# EAGLE board 1sluzba (EAGLE 8.5.0)
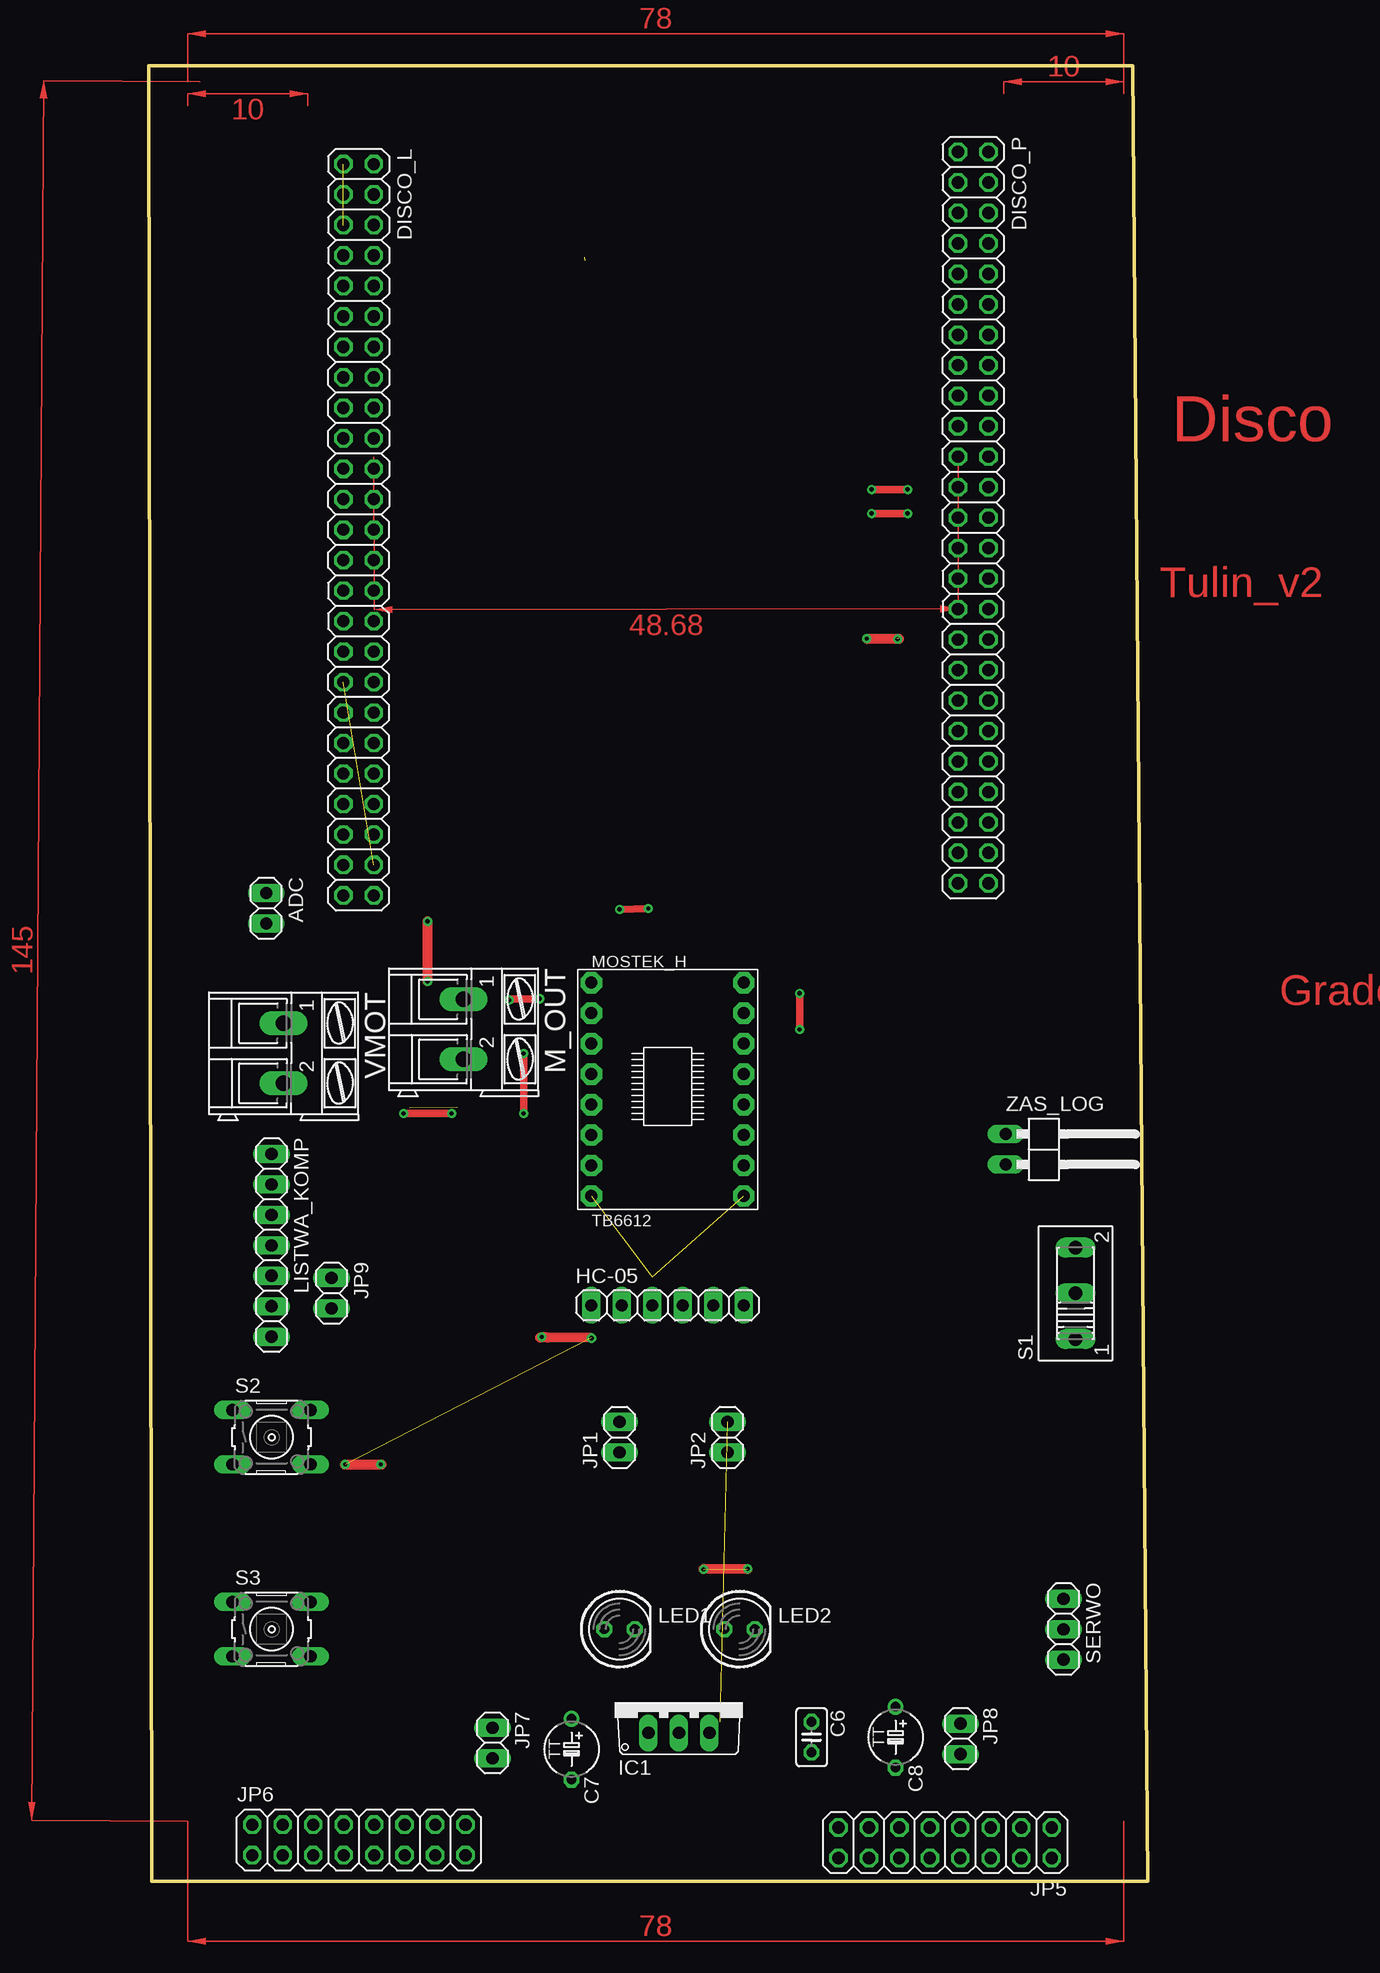
[diagram p0: board, top side]
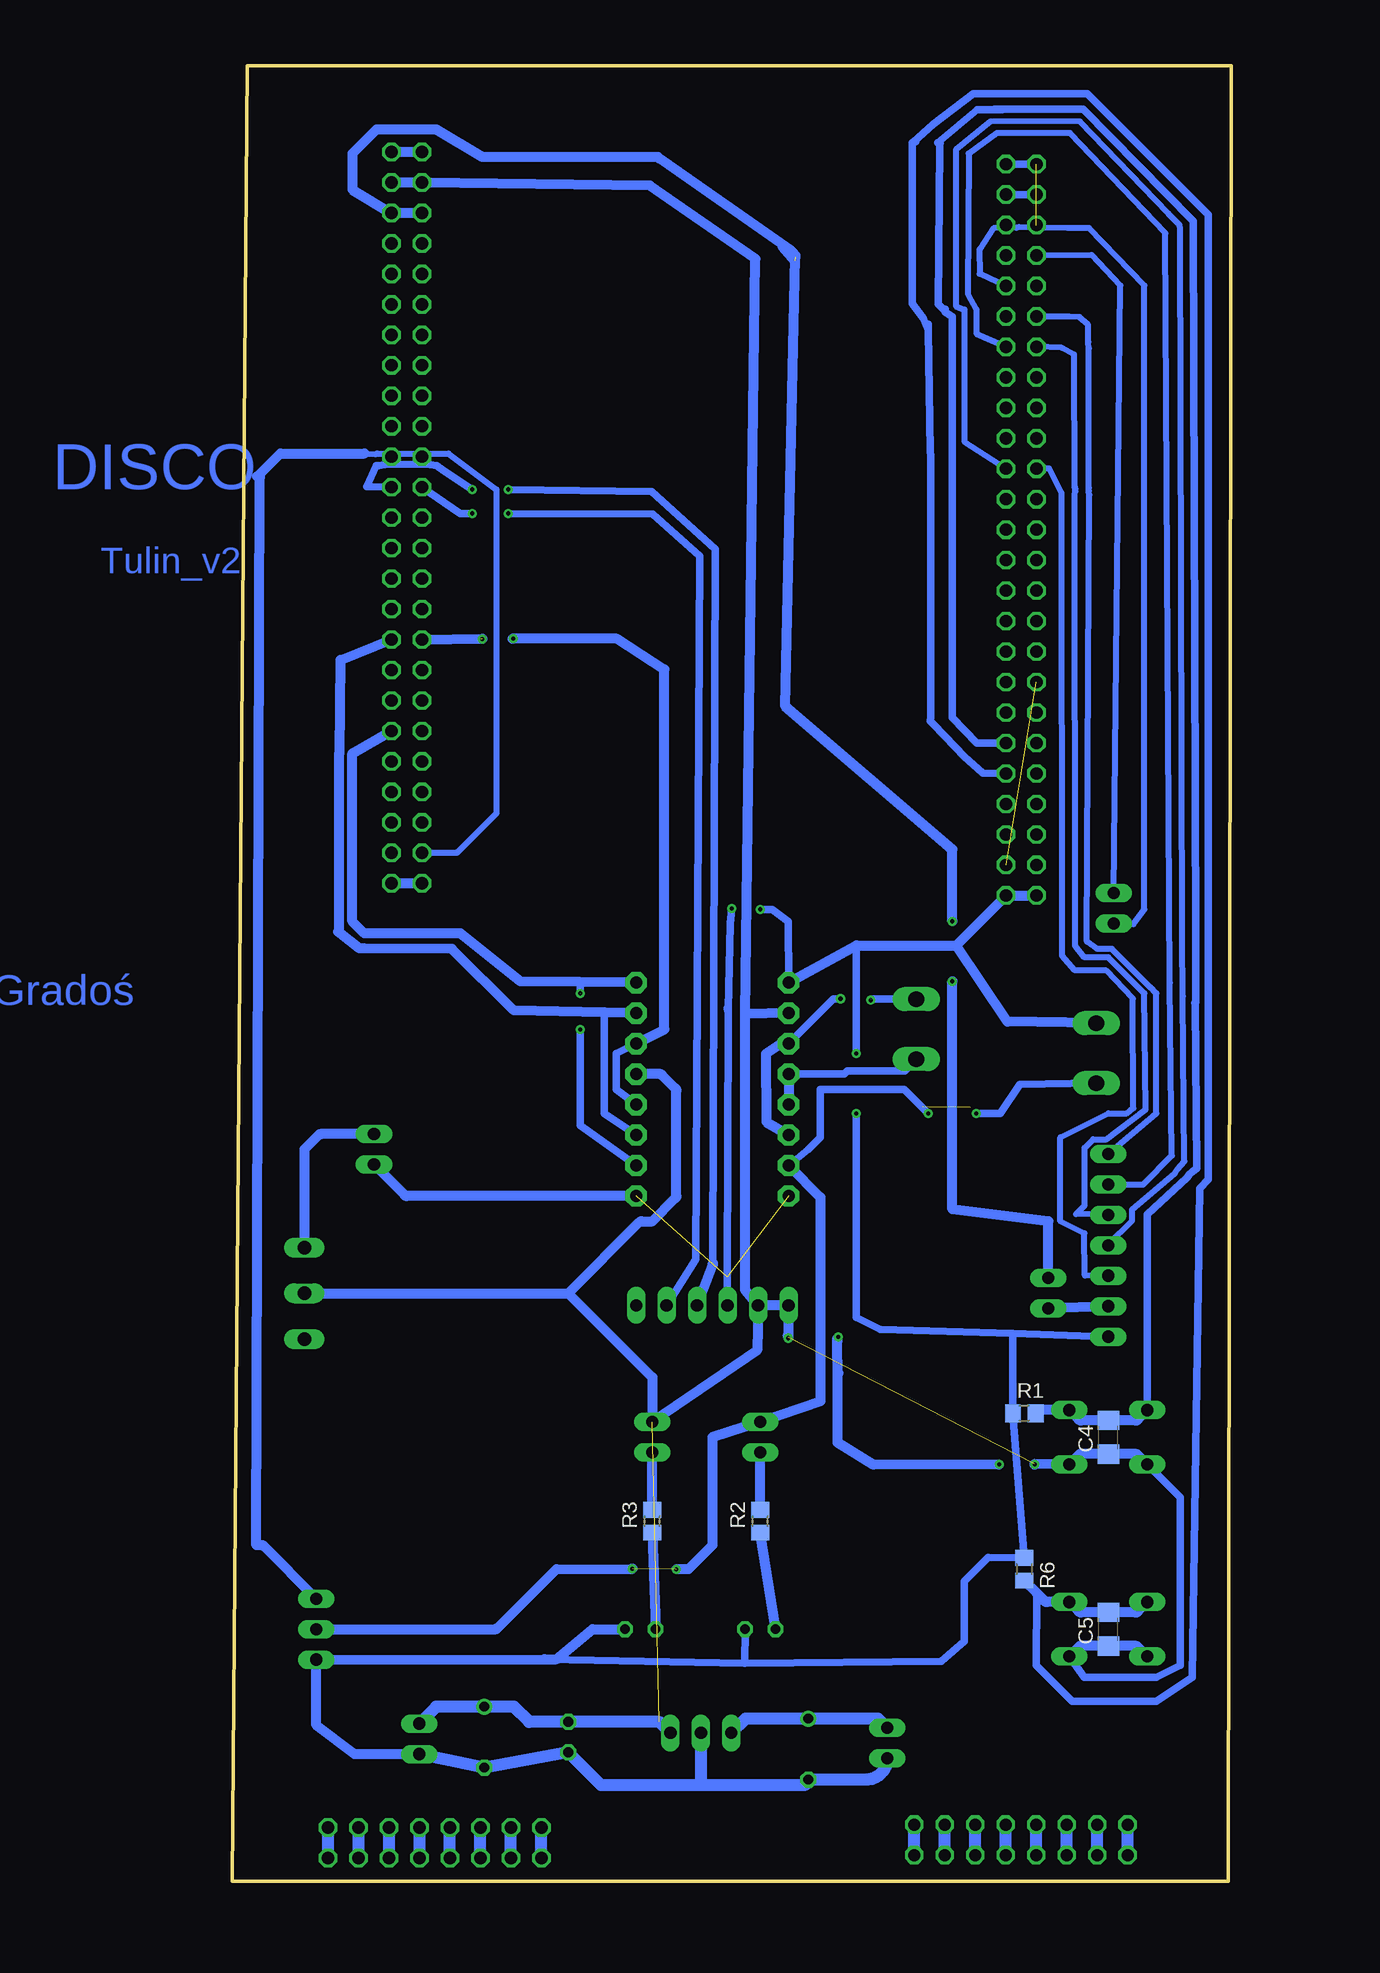
[diagram p1: board, bottom side, seen from below]

Size 83.24 x 151.31 mm. Coordinates in mm from the lower left corner, seen from the top.
Outline: 0.24,0 83.24,0 82,151.31 0,151.31 0.24,0
Copper layers (1*16): Top 0.035mm / dielectric 1.5mm / Bottom 0.035mm
Design rules "default": minimum track width 10mil, minimum drill 24mil, track to track 8mil, track to pad 8mil, pad to pad 8mil, via to via 8mil, smd to smd 8mil, copper to edge 40mil, drill to drill 8mil, minimum pad ring 10mil, minimum via ring 8mil, stop-mask expansion 4mil, vias tented up to drill 0mil, thermal gap 10mil

## Footprints (pad centres in the part's own frame; a part is rotated, then mirrored left to right if it is on the bottom)
1X02 = drill 1.016 long: 1 -1.27,0; 2 1.27,0
C1206 = smd 1.6 x 1.8: 1 -1.4,0; 2 1.4,0
C025-025X050 = drill 0.813 octagon: 1 -1.27,0; 2 1.27,0
TAP5-45 = drill 0.813: + -2.54,0 | drill 0.813 octagon: - 2.54,0
2X25 = drill 1.016 octagon: 1 -30.48,-1.27; 2 -30.48,1.27; 3 -27.94,-1.27; 4 -27.94,1.27; 5 -25.4,-1.27; 6 -25.4,1.27; 7 -22.86,-1.27; 8 -22.86,1.27; 9 -20.32,-1.27; 10 -20.32,1.27; 11 -17.78,-1.27; 12 -17.78,1.27; 13 -15.24,-1.27; 14 -15.24,1.27; 15 -12.7,-1.27; 16 -12.7,1.27; 17 -10.16,-1.27; 18 -10.16,1.27; 19 -7.62,-1.27; 20 -7.62,1.27; 21 -5.08,-1.27; 22 -5.08,1.27; 23 -2.54,-1.27; 24 -2.54,1.27; 25 0,-1.27; 26 0,1.27; 27 2.54,-1.27; 28 2.54,1.27; 29 5.08,-1.27; 30 5.08,1.27; 31 7.62,-1.27; 32 7.62,1.27; 33 10.16,-1.27; 34 10.16,1.27; 35 12.7,-1.27; 36 12.7,1.27; 37 15.24,-1.27; 38 15.24,1.27; 39 17.78,-1.27; 40 17.78,1.27; 41 20.32,-1.27; 42 20.32,1.27; 43 22.86,-1.27; 44 22.86,1.27; 45 25.4,-1.27; 46 25.4,1.27; 47 27.94,-1.27; 48 27.94,1.27; 49 30.48,-1.27; 50 30.48,1.27
1X06 = drill 1.016 long: 1 -6.35,0; 2 -3.81,0; 3 -1.27,0; 4 1.27,0; 5 3.81,0; 6 6.35,0
TO220V = drill 1.016 long: 1 -2.54,-2.54; 2 0,-2.54; 3 2.54,-2.54
2X08 = drill 1.016 octagon: 1 -8.89,-1.27; 2 -8.89,1.27; 3 -6.35,-1.27; 4 -6.35,1.27; 5 -3.81,-1.27; 6 -3.81,1.27; 7 -1.27,-1.27; 8 -1.27,1.27; 9 1.27,-1.27; 10 1.27,1.27; 11 3.81,-1.27; 12 3.81,1.27; 13 6.35,-1.27; 14 6.35,1.27; 15 8.89,-1.27; 16 8.89,1.27
LED5MM = drill 0.813 octagon: A -1.27,0; K 1.27,0
1X07 = drill 1.016 long: 1 -7.62,0; 2 -5.08,0; 3 -2.54,0; 4 0,0; 5 2.54,0; 6 5.08,0; 7 7.62,0
AK300/2 = drill 1.321 long: 1 -2.515,0; 2 2.489,0
MODUL_POLOLU = drill 1 pad 1.778 octagon: A02 -6.35,1.27; AIN1 6.35,3.81; AIN2 6.35,6.35; AO1 -6.35,3.81; BIN1 6.35,-1.27; BIN2 6.35,-3.81; BO1 -6.35,-3.81; BO2 -6.35,-1.27; GND1 -6.35,8.89; GND2 -6.35,-8.89; GND3 6.35,-8.89; PWMA 6.35,8.89; PWMB 6.35,-6.35; STBY 6.35,1.27; VCC -6.35,6.35; VMOT -6.35,-6.35
R0805 = smd 1.3 x 1.5: 1 -0.95,0; 2 0.95,0
255SB = drill 1.118 long: 1 -3.81,0; 2 0,0; 3 3.81,0
B3F-10XX = drill 1.016 long: 1 -3.251,2.261; 2 3.251,2.261; 3 -3.251,-2.261; 4 3.251,-2.261
1X03 = drill 1.016 long: 1 -2.54,0; 2 0,0; 3 2.54,0
1X02/90 = drill 1.016 long: 1 -1.27,-3.81; 2 1.27,-3.81

## Placement (x,y rotation side)
ADC  [1X02]  9.79,81.08 270 top
C4  100n  [C1206]  10.24,37 90 bottom
C5  100n  [C1206]  10.24,21 90 bottom
C6  100nF  [C025-025X050]  55.24,12 270 top
C7  47uF  [TAP5-45]  35.24,11 270 top
C8  470uF  [TAP5-45]  62.24,12 270 top
DISCO_L  [2X25]  17.5,112.65 270 top
DISCO_P  [2X25]  68.71,113.65 270 top
HC-05  [1X06]  43.24,48 0 top
IC1  786TV  [TO220V]  44.19,14.89 0 top
JP1  [1X02]  39.24,37 90 top
JP2  [1X02]  48.24,37 90 top
JP5  [2X08]  66.37,3.2 180 top
JP6  [2X08]  17.52,3.44 0 top
JP7  [1X02]  28.66,11.51 270 top
JP8  [1X02]  67.66,11.86 270 top
JP9  [1X02]  15.24,49 270 top
LED1  [LED5MM]  39.24,21 0 top
LED2  [LED5MM]  49.24,21 0 top
LISTWA_KOMP  [1X07]  10.24,53 270 top
M_OUT  [AK300/2]  26.24,71 270 top
MOSTEK_H  MODUL_POLOLU  [MODUL_POLOLU]  43.24,66 0 top
R1  100k  [R0805]  17.24,39 0 bottom
R2  300  [R0805]  39.24,30 90 bottom
R3  300  [R0805]  48.24,30 90 bottom
R6  100k  [R0805]  17.24,26 270 bottom
S1  [255SB]  77.24,49 90 top
S2  [B3F-10XX]  10.24,37 0 top
S3  [B3F-10XX]  10.24,21 0 top
SERWO  [1X03]  76.24,21 270 top
VMOT  [AK300/2]  11.24,69 270 top
ZAS_LOG  [1X02/90]  75.24,61 270 top

## Library data of the parts
ADC DISCO_L DISCO_P HC-05 JP1 JP2 JP5-JP9 LISTWA_KOMP SERWO ZAS_LOG = pinhead
C4-C8 = rcl; SPICEPREFIX: C
IC1 = linear
LED1 LED2 = led
M_OUT VMOT = con-ptr500; OC_FARNELL: unknown; OC_NEWARK: unknown
MOSTEK_H = TB6612FNG
R1-R3 R6 = rcl; SPICEPREFIX: R
S1 = switch
S2 S3 = switch-omron; MPN: B3F-1000; OC_FARNELL: 176432; OC_NEWARK: 36M3542

## Nets
3V: DISCO_P.5 DISCO_P.6 JP9.1
A: JP9.2 LISTWA_KOMP.6
BOOT0: DISCO_P.21
GND: C6.2 C7.- C8.- DISCO_L.49 DISCO_L.50 HC-05.3 IC1.2 JP7.2 JP8.2 LED1.K LED2.K LISTWA_KOMP.7 MOSTEK_H.GND1 MOSTEK_H.GND2 MOSTEK_H.GND3 R1.1 R6.1 SERWO.3 VMOT.1 ZAS_LOG.2
GND1: DISCO_L.1 DISCO_L.2 DISCO_L.5
GND2: DISCO_L.23
GND3: DISCO_P.1 DISCO_P.2
GNDD: DISCO_P.49 DISCO_P.50
M_OUT_1: M_OUT.1 MOSTEK_H.AO1 MOSTEK_H.BO1
M_OUT_2: M_OUT.2 MOSTEK_H.A02 MOSTEK_H.BO2
N$1: JP5.1 JP5.2
N$2: JP5.3 JP5.4
N$3: JP5.5 JP5.6
N$4: JP5.7 JP5.8
N$5: JP5.9 JP5.10
N$6: JP5.11 JP5.12
N$7: JP5.13 JP5.14
N$8: JP5.15 JP5.16
N$9: JP6.1 JP6.2
N$10: JP6.3 JP6.4
N$11: JP6.5 JP6.6
N$12: JP6.7 JP6.8
N$13: JP6.9 JP6.10
N$14: JP6.11 JP6.12
N$15: JP6.13 JP6.14
N$16: JP6.15 JP6.16
N$17: C7.+ IC1.1 JP7.1
N$18: S1.3 ZAS_LOG.1
N$19: LED1.A R2.1
N$20: LED2.A R3.1
N$22: JP1.1 R2.2
N$24: JP2.1 R3.2
NC: DISCO_L.35 DISCO_L.48
NRST: DISCO_L.6
PA0: DISCO_L.12
PA1: DISCO_L.11 LISTWA_KOMP.1
PA2: DISCO_L.14 LISTWA_KOMP.2
PA3: DISCO_L.13 LISTWA_KOMP.3
PA4: DISCO_L.16
PA5: DISCO_L.15
PA6: DISCO_L.18
PA7: DISCO_L.17
PA8: DISCO_P.43
PA9: DISCO_P.44
PA10: DISCO_P.41
PA13: DISCO_P.42
PA14: DISCO_P.39
PA15: DISCO_P.40 MOSTEK_H.PWMA MOSTEK_H.PWMB
PB0: DISCO_L.22 LISTWA_KOMP.4
PB1: DISCO_L.21 LISTWA_KOMP.5
PB2: DISCO_L.24
PB3: DISCO_P.28
PB4: DISCO_P.25
PB5: DISCO_P.26
PB6: DISCO_P.23 HC-05.5
PB7: DISCO_P.24 HC-05.4
PB8: DISCO_P.19
PB9: DISCO_P.20
PB10: DISCO_L.34
PB12: DISCO_L.36
PB13: DISCO_L.37
PB14: DISCO_L.38
PB15: DISCO_L.39
PC0: DISCO_L.8
PC1: ADC.1 DISCO_L.7
PC2: ADC.2 DISCO_L.10
PC3: DISCO_L.9
PC4: DISCO_L.20
PC5: DISCO_L.19
PC6: DISCO_P.47 SERWO.1
PC7: DISCO_P.48
PC8: DISCO_P.45
PC9: DISCO_P.46
PC10: DISCO_P.37
PC11: DISCO_P.38
PC12: DISCO_P.35
PC13: DISCO_P.12
PC14: DISCO_P.9
PC15: DISCO_P.10
PD0: DISCO_P.36
PD1: DISCO_P.33 MOSTEK_H.AIN1 MOSTEK_H.BIN1
PD2: DISCO_P.34 MOSTEK_H.AIN2 MOSTEK_H.BIN2
PD3: DISCO_P.31
PD4: DISCO_P.32
PD5: DISCO_P.29
PD6: DISCO_P.30
PD7: DISCO_P.27
PD8: C4.2 DISCO_L.40 R1.2 S2.1 S2.2
PD9: DISCO_L.41
PD10: C5.2 DISCO_L.42 R6.2 S3.1 S3.2
PD11: DISCO_L.43
PD12: DISCO_L.44
PD13: DISCO_L.45
PD14: DISCO_L.46
PD15: DISCO_L.47
PE0: DISCO_P.17
PE1: DISCO_P.18
PE2: DISCO_P.15
PE3: DISCO_P.16
PE4: DISCO_P.13
PE5: DISCO_P.14
PE6: DISCO_P.11
PE7: DISCO_L.25
PE8: DISCO_L.26
PE9: DISCO_L.27
PE10: DISCO_L.28
PE11: DISCO_L.29
PE12: DISCO_L.30
PE13: DISCO_L.31
PE14: DISCO_L.32
PE15: DISCO_L.33
PH0: DISCO_P.7
PH1: DISCO_P.8
VCC: C4.1 C5.1 C6.1 C8.+ DISCO_P.3 DISCO_P.4 HC-05.1 HC-05.2 IC1.3 JP2.2 JP8.1 MOSTEK_H.STBY MOSTEK_H.VCC S1.2 S2.3 S2.4 S3.3 S3.4
VDD: DISCO_L.3 DISCO_L.4
VDDA: DISCO_P.22
VMOT: JP1.2 MOSTEK_H.VMOT SERWO.2 VMOT.2

## Tracks (layer width: path | path; a pad name or v marks a point on that pad's centre or on a via)
3V  (via drill 0.35)  (1 unrouted)
  Top 0.813: v23.24,75 v23.24,80
  Bottom 0.813: DISCO_P.5 DISCO_P.6 73.24,141 73.24,144 71.24,146 66.24,146 62.41,143.7 47.75,143.7 47.66,143.6 36.7,135.93 36.49,135.71 36.32,135.49 36.63,135.46 36.31,135.35 37.16,97.92 23.24,86 v23.24,80 | JP9.1 15.24,55 23.24,56 v23.24,75 | 37.41,136.27 36.35,135.09
A
  Bottom 0.813: LISTWA_KOMP.6 JP9.2
GND  (via drill 0.35)  (2 unrouted)
  Top 0.61: v41.62,81.08 v39.24,81 | v31.24,69 v31.24,64
  Bottom 0.61: MOSTEK_H.GND1 36.91,79.99 38.24,81 v39.24,81 | HC-05.3 41.98,50.36 41.89,71.98 41.9,72.02 41.89,72.39 41.97,72.77 41.92,72.65 41.75,79.76 | 41.75,79.76 41.75,80 | 41.75,79.76 v41.62,81.08 | 31.24,78 v31.24,69 | LISTWA_KOMP.7 18.22,45.64 | 18.22,45.64 29.24,46 31.24,47 v31.24,64 | 18.22,45.64 R1.1 R6.1 20.24,27 22.24,25 22.24,20 24.15,18.31 40.55,18.15 | LED1.K 40.55,18.15 | 40.55,18.15 57.24,18.49
  Bottom 0.813: MOSTEK_H.GND1 31.24,78 22.93,78 | 22.93,78 DISCO_L.50 DISCO_L.49 | JP8.2 73.04,10.59 76.24,13 SERWO.3 57.24,18.49 56.24,18.49 53.24,21 LED2.K | VMOT.1 18.65,71.64 22.93,78 | MOSTEK_H.GND3 68.7,57.11 arc45 68.88,57.18 ZAS_LOG.2
  Bottom 1.016: JP7.2 arc90 30.44,8.46 C7.- arc90 35.7,8 44.24,8 | 44.24,8 52.51,8 C6.2 C8.- 65.22,10.08 JP8.2 | IC1.2 44.19,8.05 44.24,8
GND1  (1 unrouted)
  Bottom 0.61: DISCO_L.1 DISCO_L.2
GND3
  Bottom 0.813: DISCO_P.1 DISCO_P.2
GNDD
  Bottom 0.813: DISCO_P.49 DISCO_P.50
M_OUT_1  (via drill 0.35)  (1 unrouted)
  Top 0.61: v32.55,73.55 30.03,73.55 29.94,73.46
  Bottom 0.61: MOSTEK_H.AO1 33.15,73.55 v32.58,73.55 v32.55,73.55 | 32.46,73.55 v32.55,73.55 | v32.55,73.55 32.61,73.49 32.61,73.52 32.85,73.52 | M_OUT.1 30.05,73.52 30.08,73.49
  Bottom 0.813: MOSTEK_H.AO1 37.24,70 38.77,68.95 38.74,63.28 MOSTEK_H.BO1
M_OUT_2
  Bottom 0.61: MOSTEK_H.A02 32.26,67.27 32,67.53 27.22,67.53 M_OUT.2
  Bottom 0.813: MOSTEK_H.A02 MOSTEK_H.BO2
N$1
  Bottom 1.016: JP5.2 JP5.1
N$2
  Bottom 1.016: JP5.4 JP5.3
N$3
  Bottom 1.016: JP5.6 JP5.5
N$4
  Bottom 1.016: JP5.8 JP5.7
N$5
  Bottom 1.016: JP5.10 JP5.9
N$6
  Bottom 1.016: JP5.12 JP5.11
N$7
  Bottom 1.016: JP5.14 JP5.13
N$8
  Bottom 1.016: JP5.16 JP5.15
N$9
  Bottom 1.016: JP6.1 JP6.2
N$10
  Bottom 1.016: JP6.3 JP6.4
N$11
  Bottom 1.016: JP6.5 JP6.6
N$12
  Bottom 1.016: JP6.7 JP6.8
N$13
  Bottom 1.016: JP6.9 JP6.10
N$14
  Bottom 1.016: JP6.11 JP6.12
N$15
  Bottom 1.016: JP6.13 JP6.14
N$16
  Bottom 1.016: JP6.15 JP6.16
N$17
  Bottom 1.016: JP7.1 29.42,13.54 C7.+ 40.46,13.54 IC1.1
N$18
  Bottom 0.813: ZAS_LOG.1 75.86,62.27 arc-45 76.04,62.2 77.24,61 S1.3
N$19
  Bottom 0.813: LED1.A R2.1
N$20
  Bottom 0.813: R3.1 LED2.A
N$21  (1 unrouted)
N$22
  Bottom 0.813: R2.2 JP1.1
N$24
  Bottom 0.813: R3.2 JP2.1
N$26  (via drill 0.35)
  Top 0.813: v36.9,45.26 33.24,45.3 32.63,45.31
N$27  (via drill 0.35)
  Top 0.813: v16.37,34.73 v19.33,34.73 19.42,34.73
  Bottom 0.813: v19.33,34.73 29.82,34.7 32.79,36.55 32.79,42 | 32.79,42 32.79,42.39 32.73,42.33 | 32.79,42 32.82,45 32.82,45.26
N$28  (via drill 0.35)
  other vias: 32.75,45.35
N$29  (via drill 0.35)
  other vias: 62.41,103.54
N$30  (via drill 0.35)
  other vias: 30.03,73.43
NC  (1 unrouted)
PA1
  Bottom 0.508: LISTWA_KOMP.1 6.24,64 6.24,74.01 6.53,74.3 6.74,74.51 9.94,77.71 11.16,77.71 12.02,78.31 11.82,115.53 11.87,115.88 11.87,116.15 11.87,127.75 11.91,128.28 11.92,129.72 12.66,130.37 13.51,130.41 14.31,130.41 DISCO_L.11
PA2
  Bottom 0.508: LISTWA_KOMP.2 7.34,58.07 4.95,60.48 5.1,74.87 5.48,137.35 13.44,145.71 19.54,145.71 21.87,144 21.95,132.29 21.24,131 21.24,129 DISCO_L.14
PA3
  Bottom 0.508: LISTWA_KOMP.3 12.93,55.61 12.22,56.32 12.22,61.12 11.51,61.84 10.4,61.84 7.12,64.32 7.24,74 10.24,77 12.24,77 13.01,77.96 13.04,115.55 13.01,115.8 12.98,115.84 12.98,116.04 13.03,116.22 13.08,127.24 14.1,127.82 DISCO_L.13
PA15  (via drill 0.35)  (1 unrouted)
  Top 0.61: v54.24,71 v54.24,74
  Bottom 0.61: MOSTEK_H.PWMB 54.24,63 v54.24,71 | 54.24,74.94 v54.24,74
  Bottom 0.813: MOSTEK_H.PWMA 54.24,74.94 59.24,75 64.24,79 72.24,79 73.24,80 73.24,94 DISCO_P.40
PB0
  Bottom 0.508: LISTWA_KOMP.4 10.24,53.05 8.26,55.03 8.26,55.98 8.24,56 4.69,58.99 4.44,59.37 3.91,60 4.03,73.75 4.08,78.57 4.26,137.72 4.29,138.03 5.24,139 12.61,146.66 20.03,146.69 22.95,144.3 22.95,131.29 22.24,131 22.24,120 DISCO_L.22
PB1
  Bottom 0.508: LISTWA_KOMP.5 12.2,50.48 12.24,54 14.24,55 14.24,62 10.24,64 8.72,64 8.41,64.23 8.15,64.43 8.19,73.57 10.4,75.9 13.02,75.92 14.09,77.12 14.12,115.71 15.17,117.75 DISCO_L.21
PB6  (via drill 0.35)
  Top 0.61: v63.24,114 v60.24,114
  Bottom 0.61: HC-05.5 44.64,51.83 44.3,110.45 48.2,113.95 v60.24,114 | DISCO_P.23 64.24,114 v63.24,114
PB7  (via drill 0.35)
  Top 0.61: v63.24,116 v60.24,116
  Bottom 0.61: 43.19,51.51 43.01,111.04 48.29,115.83 v60.24,116 | DISCO_P.24 72.03,116.23 71.24,118 71.05,118 70.26,118.13 66.73,118.07 66.22,117.97 65.56,117.52 v63.24,116
  Bottom 0.813: HC-05.4 43.19,51.38 43.19,51.51
PC1
  Bottom 0.508: ADC.1 9.24,133 11.62,135.55 DISCO_L.7
  Bottom 0.813: 15.89,135.74 arc-45 16.06,135.67 DISCO_L.7
PC2
  Bottom 0.508: ADC.2 8.16,79.76 7.24,81 7.24,133 11.85,137.79 13.64,137.8 15.98,137.82 17.7,137.87 | 17.7,137.87 17.88,137.8 | 17.7,137.87 19.82,137.76 20.93,136.02 21,136 20.97,133.97 DISCO_L.10
PC6
  Bottom 0.508: 72.24,119 71.31,118.93 arc45 71.13,119 65.24,119 61.24,116 61.24,89 64.46,85.78 arc45 64.63,85.71 DISCO_P.47
  Bottom 0.813: SERWO.1 80.63,27.93 arc-45 80.8,28 81.24,28 80.94,117.02 arc45 81.17,117.07 79.24,119 72.24,119
PD1  (via drill 0.35)  (1 unrouted)
  Top 0.813: v59.84,103.57 62.52,103.57
  Bottom 0.61: MOSTEK_H.BIN1 51.24,66 51.24,69 MOSTEK_H.AIN1
  Bottom 0.813: MOSTEK_H.AIN1 47.24,71 47.24,101 51.19,103.57 v59.84,103.57 59.9,103.57 | DISCO_P.33 62.4,103.57
PD2
  Bottom 0.61: MOSTEK_H.BIN2 52.24,64 52.23,72.41
  Bottom 0.813: MOSTEK_H.AIN2 52.23,72.41 59.78,72.58 64.95,77.71 72.27,77.74 72.65,77.74 74.24,79 74.43,79.14 74.33,79.24 74.33,93.96 74.29,94 74.22,101.79 DISCO_P.34
PD8
  Bottom 0.61: DISCO_L.40 21.19,94.86 23.24,97 23.24,130.41 23.83,130.78 23.83,131.03 23.96,130.97 24.43,131.47 24.27,144.62 24.26,144.96 24.29,144.89 24.44,144.89 21.16,147.67 19.08,147.67 19.8,147.65 19.74,147.69 12.32,147.69 3.18,138.34 2.97,78.56 2.95,78.33 2.95,73.26 3.05,73.2 2.98,73.2 2.88,59.39 3.19,59.17 3.51,58.89 3.68,58.67 6.99,55.58 S2.1
  Bottom 0.813: S2.1 7.77,38.47 arc45 7.95,38.4 C4.2 12.52,38.4 arc45 12.71,38.47 S2.2 15.92,39.26 arc-45 16.1,39.19 R1.2
PD10
  Bottom 0.61: 15.71,23.52 15.86,23.52 16.1,23.77 | S3.2 14.24,23.26 | 16.21,24.02 16.24,18 13.24,15 6.24,15 3.24,17 2.61,57.72 1.91,58.51 1.91,73.11 1.9,73.12 1.9,138.9 12,149 19.68,149 20.07,148.99 20.31,149 21.48,149 24.81,146.43 26.51,144.94 26.28,144.99 26.57,144.91 26.57,131.48 25.66,130.28 25.25,129.28 25.25,129.79 25.24,129.26 25.06,119.17 25.05,118.81 25.05,97.01 25.06,96.68 25.05,96.67 25.05,96.66 24.82,96.43 23,94.53 23,94.51 22.24,93.75 20.69,92.37 DISCO_L.42
  Bottom 0.813: S3.1 7.77,22.47 arc45 7.95,22.4 C5.2 12.52,22.4 arc45 12.71,22.47 S3.2 | 14.24,23.26 15.34,23.26 arc45 15.52,23.34 15.71,23.52 16.21,24.02 R6.2
VCC  (2 unrouted)
  Bottom 0.61: S3.4 12.24,17 6.24,17 4.24,18 4.24,32 S2.3
  Bottom 0.813: DISCO_P.4 DISCO_P.3 48.45,141.33 39.66,135.23 40.51,72.3 | MOSTEK_H.VCC 40.51,72.3 | HC-05.2 HC-05.1 36.9,45.31 36.95,45.56 | HC-05.2 40.51,49.3 40.51,72.3 | HC-05.2 39.51,44.25 JP2.2 48.24,42 55.24,49 | S1.2 55.24,49 | 55.24,49 49.31,54.93 arc45 49.13,55 48.24,55 46.31,56.93 arc-45 46.24,57.11 46.24,65.89 arc-45 46.31,66.07 47.44,67.2 arc-45 47.61,67.27 MOSTEK_H.STBY | S3.3 7.77,19.53 arc-45 7.95,19.6 C5.1 12.52,19.6 arc-45 12.71,19.53 S3.4 | S2.3 7.77,35.53 arc-45 7.95,35.6 C4.1 12.52,35.6 arc-45 12.71,35.53 S2.4 16.41,34.76 16.37,34.71
  Bottom 1.016: IC1.3 47.65,13.27 C6.1 58.51,13.27 59.78,14.54 C8.+ 66.25,14.54 JP8.1
VDD
  Bottom 0.61: DISCO_L.3 DISCO_L.4
VMOT  (via drill 0.35)  (1 unrouted)
  Top 0.61: v25.24,64 v21.24,64
  Top 0.813: v49.92,26.02 v46.24,26
  Bottom 0.61: VMOT.2 17.63,66.41 19.24,64 v21.24,64 | MOSTEK_H.VMOT 35.24,61 34.24,62 34.24,66 31.93,66 31.52,65.97 30.93,66 30.55,66 27.24,66 v25.24,64
  Bottom 0.813: SERWO.2 61.34,21 arc-45 61.17,21.07 56.24,26 49.96,26.01 arc45 49.87,26.04 | MOSTEK_H.VMOT 34.24,57 34.24,40 JP1.2 43.24,37 43.24,28 45.24,26 v46.24,26
(copper drawn outside any net)
  shapes: Top area x7

## Text on the board
Top: Disco | Tulin_v2 | Gradoś | H
Bottom: DISCO | Tulin_v2 | Gradoś | H